# Altium PCB Module Board.PcbDoc (part 1 of 6)
Units mm, origin at the board's own origin, x right, y up, seen from the top; angles counter-clockwise.
Board outline 300 x 80 mm, 4 copper layers (Top Layer, GND1-Layer, GND2-Layer, Bottom Layer), stack 1.586 mm thick; 425 components, 248 nets, 1063 pads, 936 vias.
Unrouted connection lines stored in the file: 3.
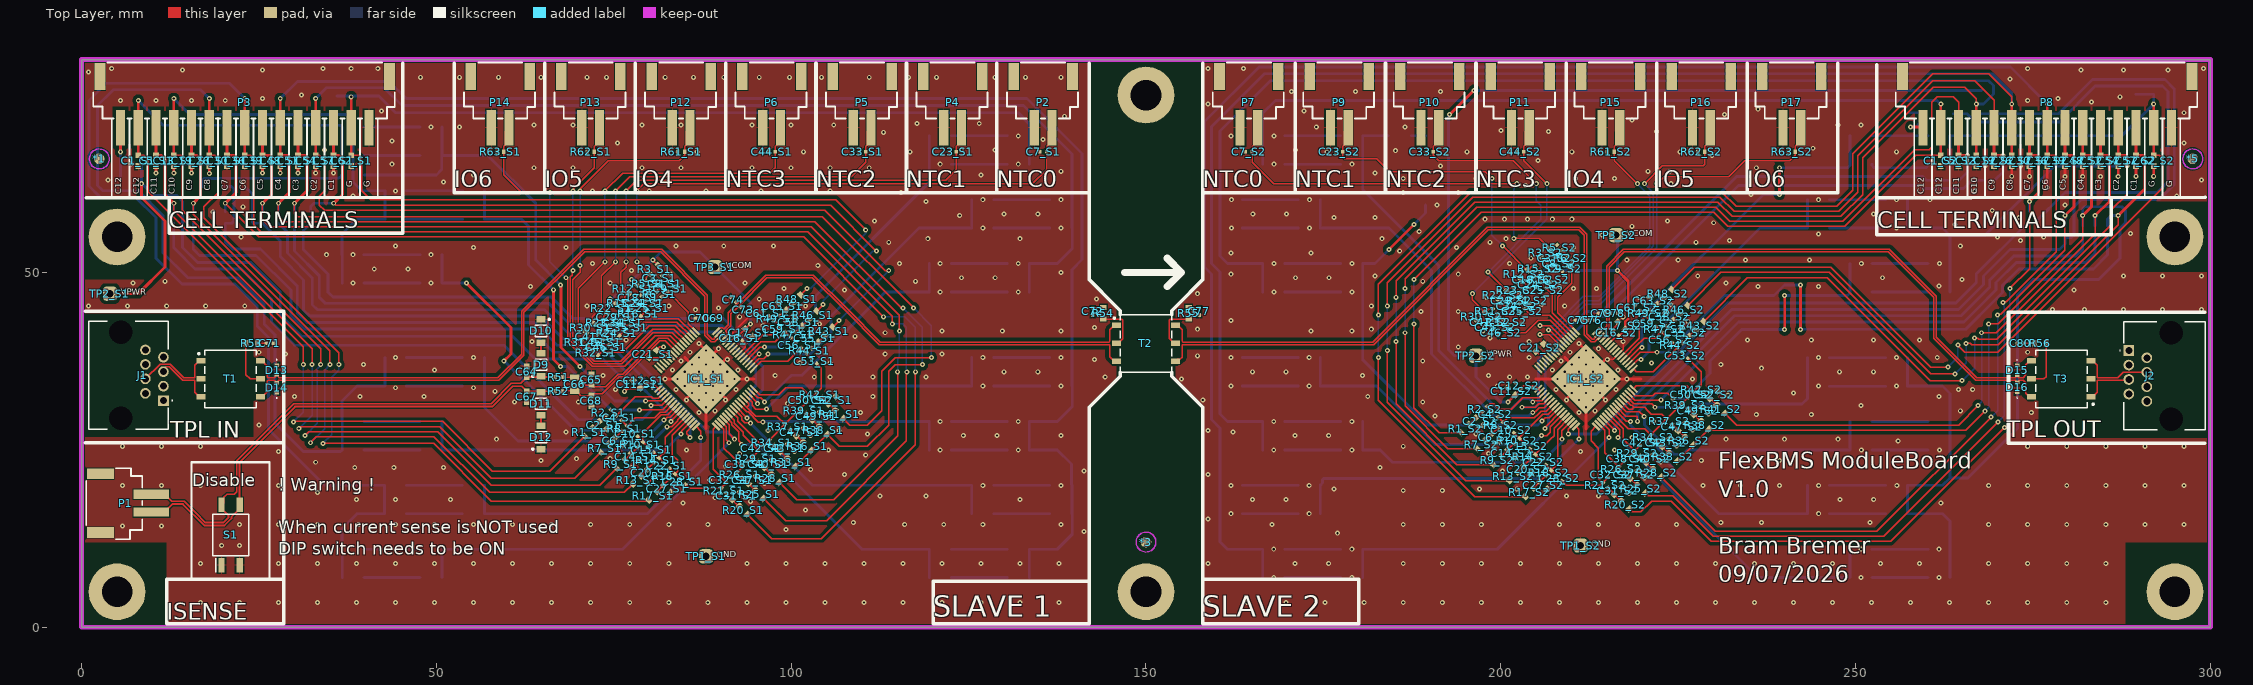
[diagram p0: Top Layer view]
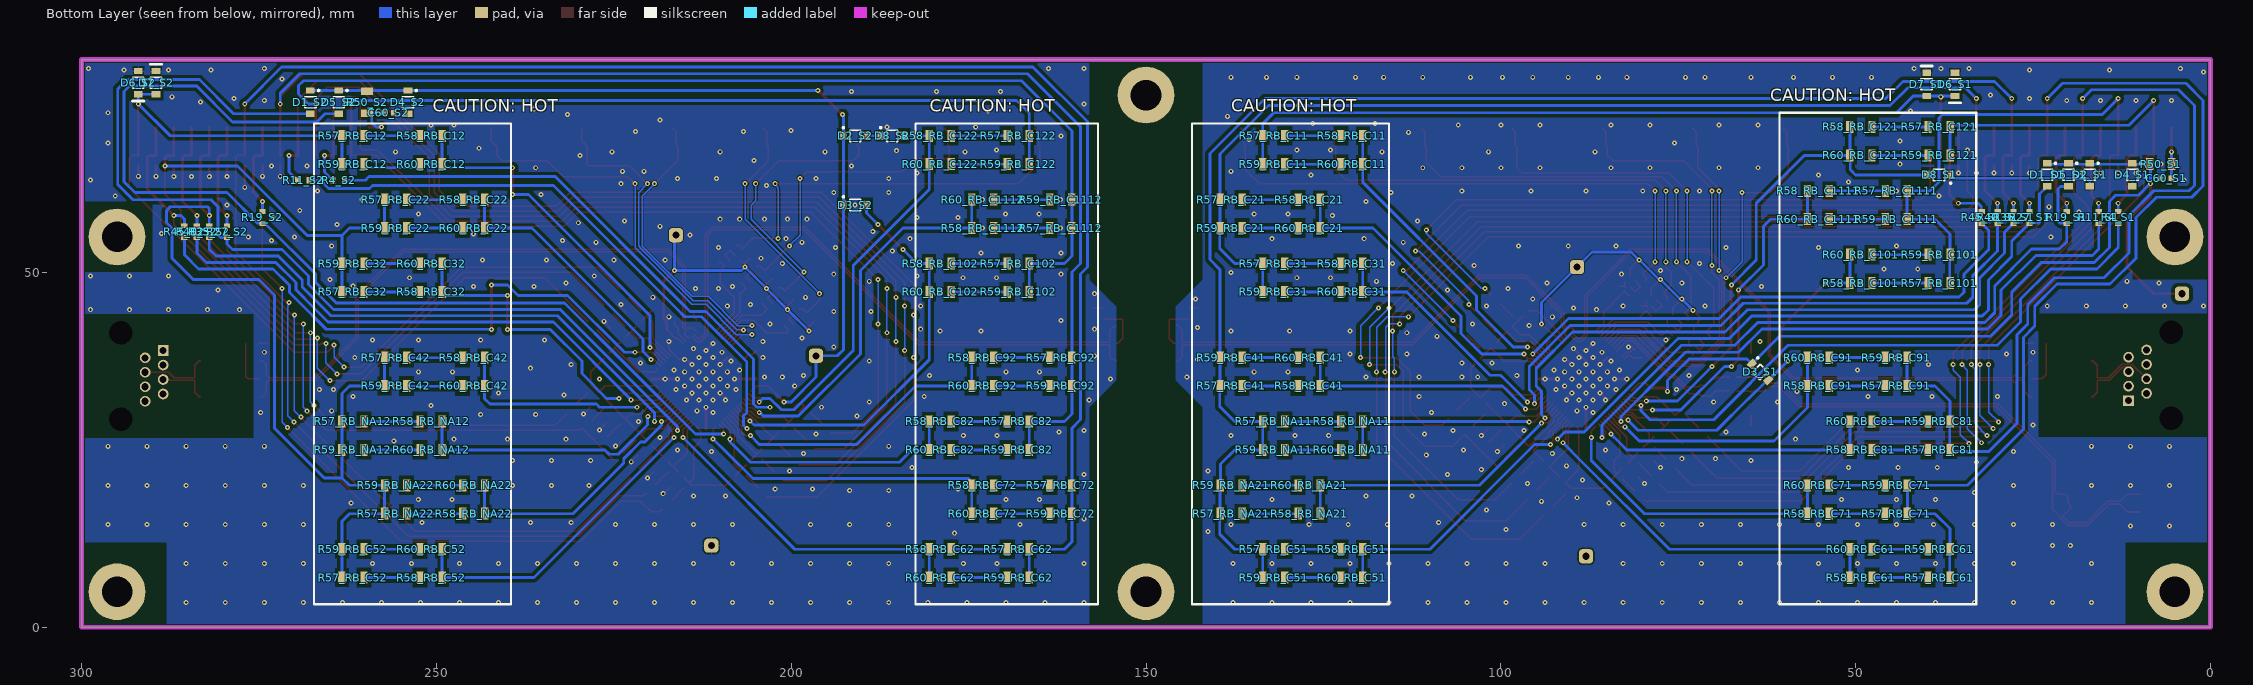
[diagram p1: Bottom Layer view, seen from below]
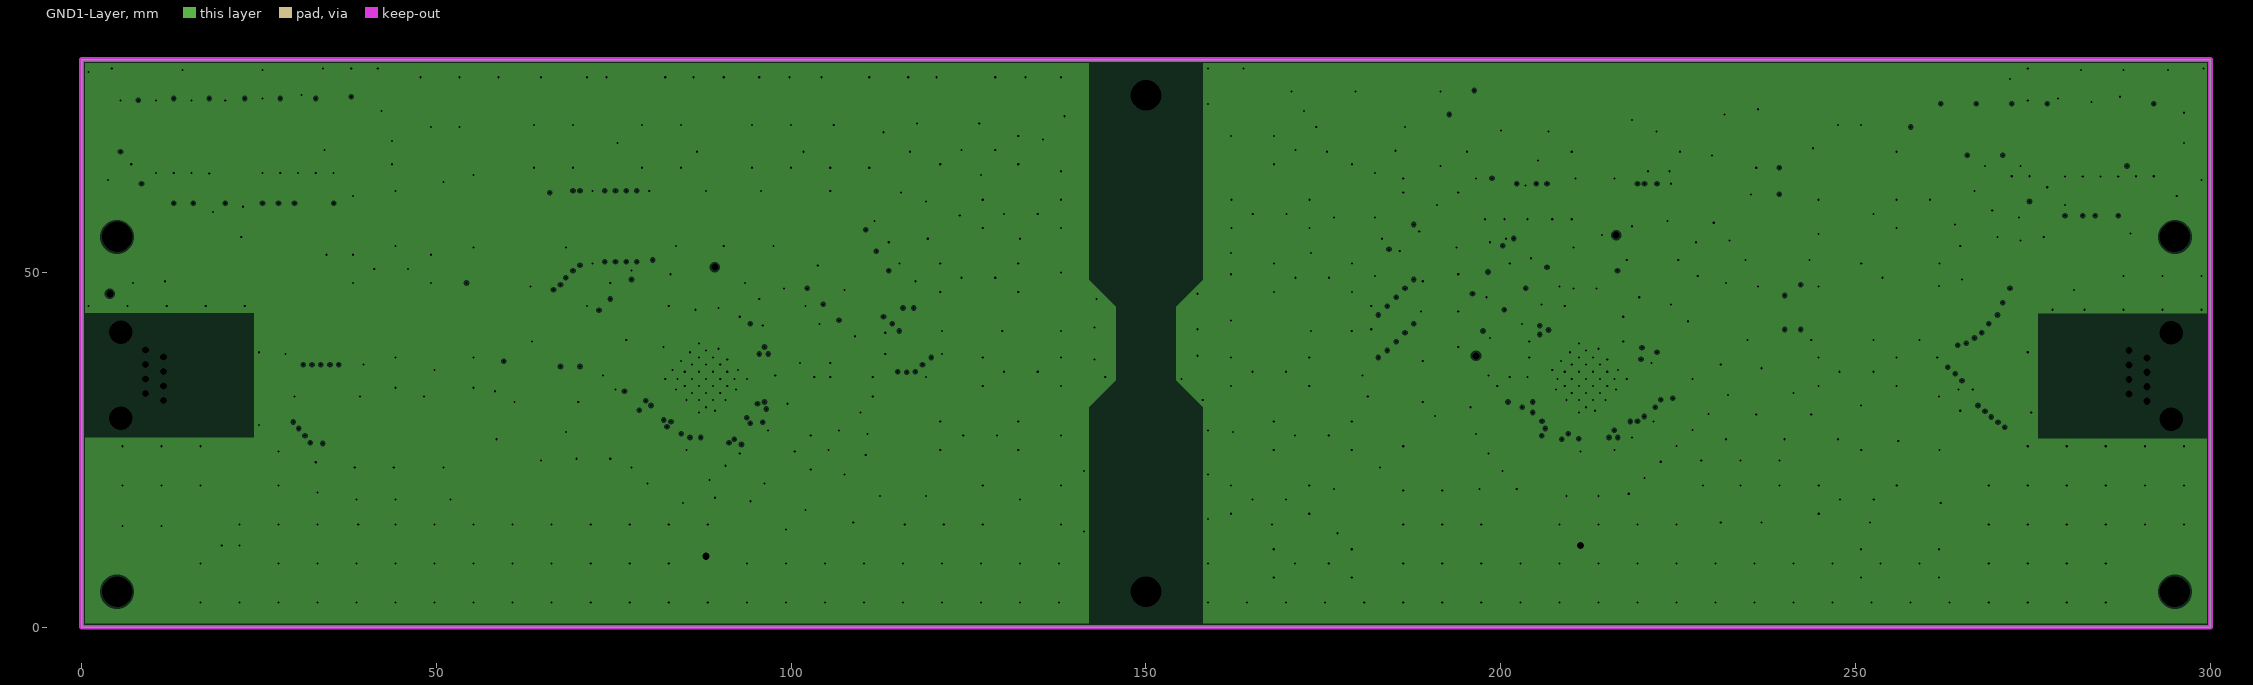
[diagram p2: GND1-Layer, clearances drawn from the general rule]
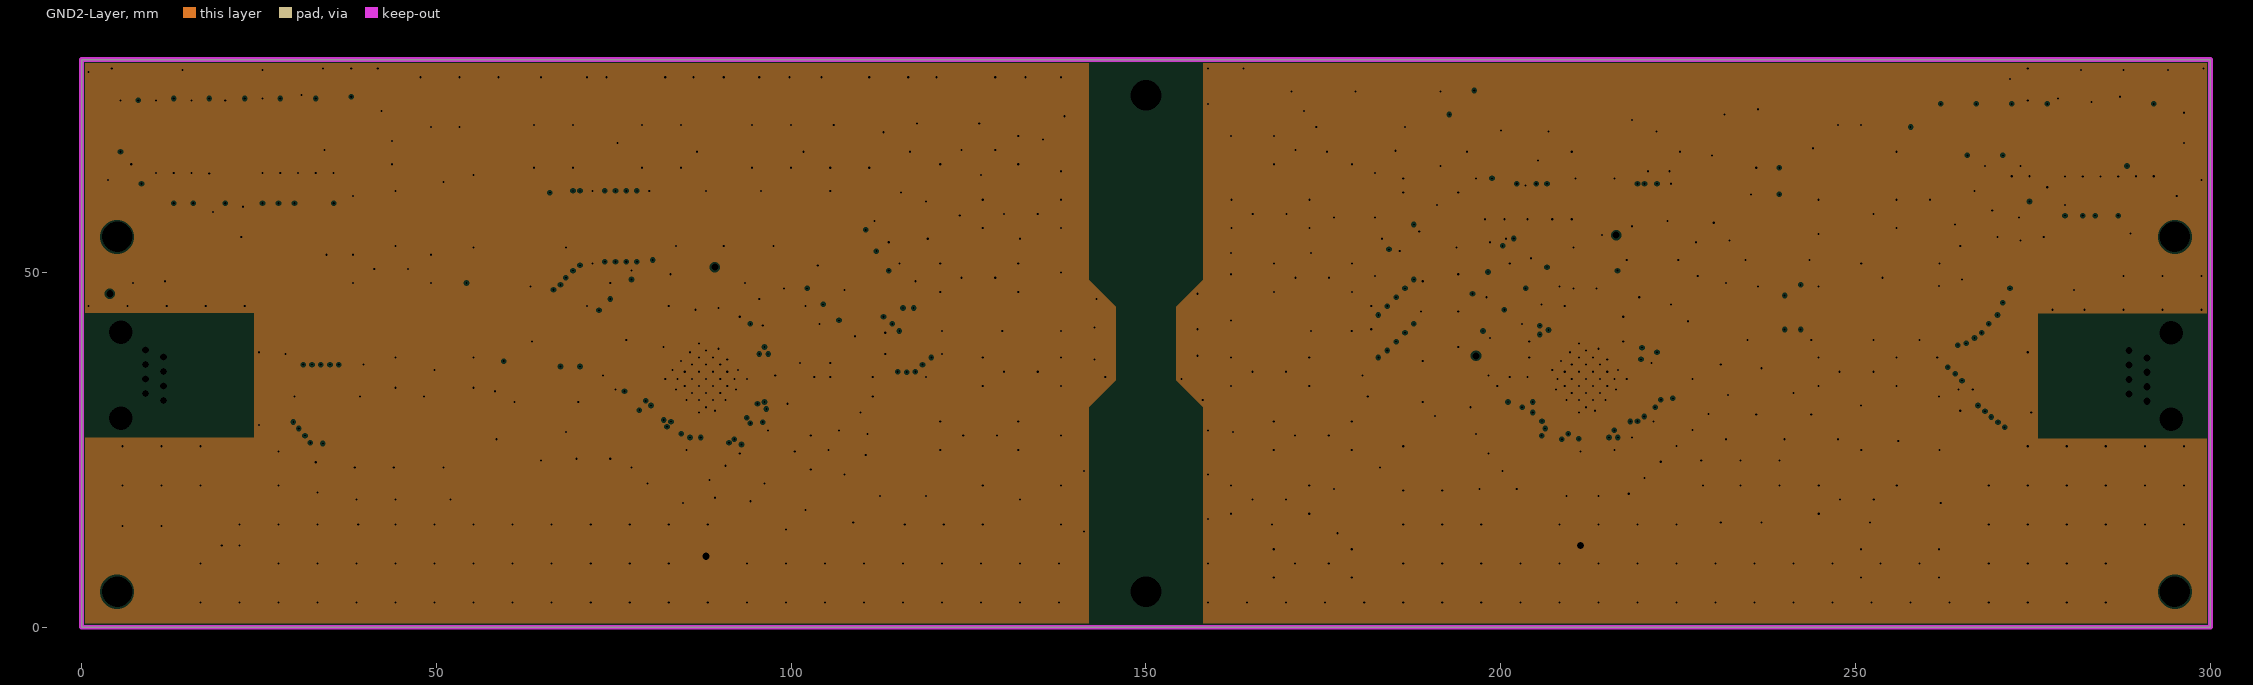
[diagram p3: GND2-Layer, clearances drawn from the general rule]
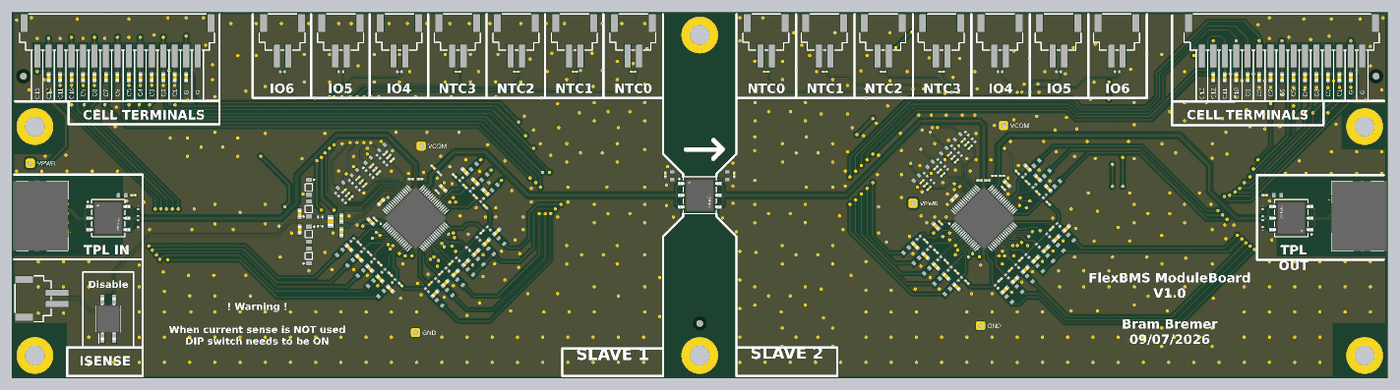
[diagram p8: 3D render of the assembled board from above, using the file's embedded part models]

## Layer stack, top to bottom
Top Solder: solder mask 0.0102, Solder Resist, Dk 3.8
Top Layer: signal copper 0.035
Dielectric1: prepreg 0.2104, FR-4, Dk 4.4
GND1-Layer: plane copper 0.0152, net (Multiple Nets)
Dielectric2: core 1.065, FR-4, Dk 4.6
GND2-Layer: plane copper 0.0152, net (Multiple Nets)
Dielectric3: prepreg 0.2104, FR-4, Dk 4.4
Bottom Layer: signal copper 0.035
Bottom Solder: solder mask 0.0102, Solder Resist, Dk 3.8

## Board outline
0,0 300,0 300,80 0,80

## Design rules (kind name [scope] priority, off if disabled: settings)
BoardOutlineClearance [All] p1: gap=0.25 ignorepadtopadclearanceinfootprint=FALSE except(0: Arc-SplitContinuation Track-SplitContinuation SMDPad-SplitContinuation THPad-SplitContinuation Via-SplitContinuation Fill-SplitContinuation Poly-SplitContinuation Region-SplitContinuation Text-SplitContinuation)
Clearance "Schematic Clearance Constraint" [InDifferentialPairClass('TPL100')] p1: gap=0.15 ignorepadtopadclearanceinfootprint=FALSE except(0.6: Arc-Fill Arc-Poly Arc-Region Track-Fill Track-Poly Track-Region Fill-Fill Fill-Poly Fill-Region Poly-Poly Poly-Region Region-Region)
Clearance Clearance_MC33771C [WithinRoom('MC33771C_S1_CLEARANCE') OR WithinRoom('MC33771C_S2_CLEARANCE') vs Not (InNet('GND_S1') OR InNet('GND_S2'))] p2: gap=0.15 ignorepadtopadclearanceinfootprint=TRUE // Exception to cope with 0.2mm spacing on the MC33771C
Clearance "Schematic Clearance Constraint_162" [InNet('CB_1_S1')] p3: gap=0.5 ignorepadtopadclearanceinfootprint=TRUE except(0.15: Arc-Text Arc-Hole Track-Text Track-Hole SMDPad-Text SMDPad-Hole THPad-Text THPad-Hole Via-Text Via-Hole Fill-Text Fill-Hole Poly-Text Poly-Hole Region-Text Region-Hole Text-Text Text-Hole)
Clearance "Schematic Clearance Constraint_161" [InNet('NetC31_S2_2')] p4: gap=0.5 ignorepadtopadclearanceinfootprint=TRUE except(0.15: Arc-Text Arc-Hole Track-Text Track-Hole SMDPad-Text SMDPad-Hole THPad-Text THPad-Hole Via-Text Via-Hole Fill-Text Fill-Hole Poly-Text Poly-Hole Region-Text Region-Hole Text-Text Text-Hole)
Clearance "Schematic Clearance Constraint_160" [InNet('NetR57_RB_C92_2')] p5: gap=0.5 ignorepadtopadclearanceinfootprint=TRUE except(0.15: Arc-Text Arc-Hole Track-Text Track-Hole SMDPad-Text SMDPad-Hole THPad-Text THPad-Hole Via-Text Via-Hole Fill-Text Fill-Hole Poly-Text Poly-Hole Region-Text Region-Hole Text-Text Text-Hole)
Clearance "Schematic Clearance Constraint_159" [InNet('NetR57_RB_C82_2')] p6: gap=0.5 ignorepadtopadclearanceinfootprint=TRUE except(0.15: Arc-Text Arc-Hole Track-Text Track-Hole SMDPad-Text SMDPad-Hole THPad-Text THPad-Hole Via-Text Via-Hole Fill-Text Fill-Hole Poly-Text Poly-Hole Region-Text Region-Hole Text-Text Text-Hole)
Clearance "Schematic Clearance Constraint_158" [InNet('NetR57_RB_C72_2')] p7: gap=0.5 ignorepadtopadclearanceinfootprint=TRUE except(0.15: Arc-Text Arc-Hole Track-Text Track-Hole SMDPad-Text SMDPad-Hole THPad-Text THPad-Hole Via-Text Via-Hole Fill-Text Fill-Hole Poly-Text Poly-Hole Region-Text Region-Hole Text-Text Text-Hole)
Clearance "Schematic Clearance Constraint_157" [InNet('NetR57_RB_C62_2')] p8: gap=0.5 ignorepadtopadclearanceinfootprint=TRUE except(0.15: Arc-Text Arc-Hole Track-Text Track-Hole SMDPad-Text SMDPad-Hole THPad-Text THPad-Hole Via-Text Via-Hole Fill-Text Fill-Hole Poly-Text Poly-Hole Region-Text Region-Hole Text-Text Text-Hole)
Clearance "Schematic Clearance Constraint_156" [InNet('NetR57_RB_C52_2')] p9: gap=0.5 ignorepadtopadclearanceinfootprint=TRUE except(0.15: Arc-Text Arc-Hole Track-Text Track-Hole SMDPad-Text SMDPad-Hole THPad-Text THPad-Hole Via-Text Via-Hole Fill-Text Fill-Hole Poly-Text Poly-Hole Region-Text Region-Hole Text-Text Text-Hole)
Clearance "Schematic Clearance Constraint_155" [InNet('NetR57_RB_C42_2')] p10: gap=0.5 ignorepadtopadclearanceinfootprint=TRUE except(0.15: Arc-Text Arc-Hole Track-Text Track-Hole SMDPad-Text SMDPad-Hole THPad-Text THPad-Hole Via-Text Via-Hole Fill-Text Fill-Hole Poly-Text Poly-Hole Region-Text Region-Hole Text-Text Text-Hole)
Clearance "Schematic Clearance Constraint_154" [InNet('NetR57_RB_C32_2')] p11: gap=0.5 ignorepadtopadclearanceinfootprint=TRUE except(0.15: Arc-Text Arc-Hole Track-Text Track-Hole SMDPad-Text SMDPad-Hole THPad-Text THPad-Hole Via-Text Via-Hole Fill-Text Fill-Hole Poly-Text Poly-Hole Region-Text Region-Hole Text-Text Text-Hole)
Clearance "Schematic Clearance Constraint_153" [InNet('NetR57_RB_C22_2')] p12: gap=0.5 ignorepadtopadclearanceinfootprint=TRUE except(0.15: Arc-Text Arc-Hole Track-Text Track-Hole SMDPad-Text SMDPad-Hole THPad-Text THPad-Hole Via-Text Via-Hole Fill-Text Fill-Hole Poly-Text Poly-Hole Region-Text Region-Hole Text-Text Text-Hole)
Clearance "Schematic Clearance Constraint_152" [InNet('NetR57_RB_C12_2')] p13: gap=0.5 ignorepadtopadclearanceinfootprint=TRUE except(0.15: Arc-Text Arc-Hole Track-Text Track-Hole SMDPad-Text SMDPad-Hole THPad-Text THPad-Hole Via-Text Via-Hole Fill-Text Fill-Hole Poly-Text Poly-Hole Region-Text Region-Hole Text-Text Text-Hole)
Clearance "Schematic Clearance Constraint_151" [InNet('NetC63_S2_2')] p14: gap=0.5 ignorepadtopadclearanceinfootprint=TRUE except(0.15: Arc-Text Arc-Hole Track-Text Track-Hole SMDPad-Text SMDPad-Hole THPad-Text THPad-Hole Via-Text Via-Hole Fill-Text Fill-Hole Poly-Text Poly-Hole Region-Text Region-Hole Text-Text Text-Hole)
Clearance "Schematic Clearance Constraint_150" [InNet('NetC58_S2_2')] p15: gap=0.5 ignorepadtopadclearanceinfootprint=TRUE except(0.15: Arc-Text Arc-Hole Track-Text Track-Hole SMDPad-Text SMDPad-Hole THPad-Text THPad-Hole Via-Text Via-Hole Fill-Text Fill-Hole Poly-Text Poly-Hole Region-Text Region-Hole Text-Text Text-Hole)
Clearance "Schematic Clearance Constraint_149" [InNet('NetC55_S2_2')] p16: gap=0.5 ignorepadtopadclearanceinfootprint=TRUE except(0.15: Arc-Text Arc-Hole Track-Text Track-Hole SMDPad-Text SMDPad-Hole THPad-Text THPad-Hole Via-Text Via-Hole Fill-Text Fill-Hole Poly-Text Poly-Hole Region-Text Region-Hole Text-Text Text-Hole)
Clearance "Schematic Clearance Constraint_148" [InNet('NetC52_S2_2')] p17: gap=0.5 ignorepadtopadclearanceinfootprint=TRUE except(0.15: Arc-Text Arc-Hole Track-Text Track-Hole SMDPad-Text SMDPad-Hole THPad-Text THPad-Hole Via-Text Via-Hole Fill-Text Fill-Hole Poly-Text Poly-Hole Region-Text Region-Hole Text-Text Text-Hole)
Clearance "Schematic Clearance Constraint_147" [InNet('NetC49_S2_2')] p18: gap=0.5 ignorepadtopadclearanceinfootprint=TRUE except(0.15: Arc-Text Arc-Hole Track-Text Track-Hole SMDPad-Text SMDPad-Hole THPad-Text THPad-Hole Via-Text Via-Hole Fill-Text Fill-Hole Poly-Text Poly-Hole Region-Text Region-Hole Text-Text Text-Hole)
Clearance "Schematic Clearance Constraint_146" [InNet('NetC47_S2_2')] p19: gap=0.5 ignorepadtopadclearanceinfootprint=TRUE except(0.15: Arc-Text Arc-Hole Track-Text Track-Hole SMDPad-Text SMDPad-Hole THPad-Text THPad-Hole Via-Text Via-Hole Fill-Text Fill-Hole Poly-Text Poly-Hole Region-Text Region-Hole Text-Text Text-Hole)
Clearance "Schematic Clearance Constraint_145" [InNet('NetC43_S2_2')] p20: gap=0.5 ignorepadtopadclearanceinfootprint=TRUE except(0.15: Arc-Text Arc-Hole Track-Text Track-Hole SMDPad-Text SMDPad-Hole THPad-Text THPad-Hole Via-Text Via-Hole Fill-Text Fill-Hole Poly-Text Poly-Hole Region-Text Region-Hole Text-Text Text-Hole)
Clearance "Schematic Clearance Constraint_144" [InNet('NetC40_S2_2')] p21: gap=0.5 ignorepadtopadclearanceinfootprint=TRUE except(0.15: Arc-Text Arc-Hole Track-Text Track-Hole SMDPad-Text SMDPad-Hole THPad-Text THPad-Hole Via-Text Via-Hole Fill-Text Fill-Hole Poly-Text Poly-Hole Region-Text Region-Hole Text-Text Text-Hole)
Clearance "Schematic Clearance Constraint_143" [InNet('NetR57_RB_C102_2')] p22: gap=0.5 ignorepadtopadclearanceinfootprint=TRUE except(0.15: Arc-Text Arc-Hole Track-Text Track-Hole SMDPad-Text SMDPad-Hole THPad-Text THPad-Hole Via-Text Via-Hole Fill-Text Fill-Hole Poly-Text Poly-Hole Region-Text Region-Hole Text-Text Text-Hole)
Clearance "Schematic Clearance Constraint_142" [InNet('NetR57_RB_C122_2')] p23: gap=0.5 ignorepadtopadclearanceinfootprint=TRUE except(0.15: Arc-Text Arc-Hole Track-Text Track-Hole SMDPad-Text SMDPad-Hole THPad-Text THPad-Hole Via-Text Via-Hole Fill-Text Fill-Hole Poly-Text Poly-Hole Region-Text Region-Hole Text-Text Text-Hole)
Clearance "Schematic Clearance Constraint_141" [InNet('NetR57_RB_C1112_2')] p24: gap=0.5 ignorepadtopadclearanceinfootprint=TRUE except(0.15: Arc-Text Arc-Hole Track-Text Track-Hole SMDPad-Text SMDPad-Hole THPad-Text THPad-Hole Via-Text Via-Hole Fill-Text Fill-Hole Poly-Text Poly-Hole Region-Text Region-Hole Text-Text Text-Hole)
Clearance "Schematic Clearance Constraint_140" [InNet('NetR59_RB_C82_2')] p25: gap=0.5 ignorepadtopadclearanceinfootprint=TRUE except(0.15: Arc-Text Arc-Hole Track-Text Track-Hole SMDPad-Text SMDPad-Hole THPad-Text THPad-Hole Via-Text Via-Hole Fill-Text Fill-Hole Poly-Text Poly-Hole Region-Text Region-Hole Text-Text Text-Hole)
Clearance "Schematic Clearance Constraint_139" [InNet('S2_VBAT')] p26: gap=0.5 ignorepadtopadclearanceinfootprint=TRUE except(0.15: Arc-Text Arc-Hole Track-Text Track-Hole SMDPad-Text SMDPad-Hole THPad-Text THPad-Hole Via-Text Via-Hole Fill-Text Fill-Hole Poly-Text Poly-Hole Region-Text Region-Hole Text-Text Text-Hole)
Clearance "Schematic Clearance Constraint_138" [InNet('NetR59_RB_NA22_2')] p27: gap=0.5 ignorepadtopadclearanceinfootprint=TRUE except(0.15: Arc-Text Arc-Hole Track-Text Track-Hole SMDPad-Text SMDPad-Hole THPad-Text THPad-Hole Via-Text Via-Hole Fill-Text Fill-Hole Poly-Text Poly-Hole Region-Text Region-Hole Text-Text Text-Hole)
Clearance "Schematic Clearance Constraint_137" [InNet('NetR59_RB_NA12_2')] p28: gap=0.5 ignorepadtopadclearanceinfootprint=TRUE except(0.15: Arc-Text Arc-Hole Track-Text Track-Hole SMDPad-Text SMDPad-Hole THPad-Text THPad-Hole Via-Text Via-Hole Fill-Text Fill-Hole Poly-Text Poly-Hole Region-Text Region-Hole Text-Text Text-Hole)
Clearance "Schematic Clearance Constraint_136" [InNet('NetR59_RB_C1112_2')] p29: gap=0.5 ignorepadtopadclearanceinfootprint=TRUE except(0.15: Arc-Text Arc-Hole Track-Text Track-Hole SMDPad-Text SMDPad-Hole THPad-Text THPad-Hole Via-Text Via-Hole Fill-Text Fill-Hole Poly-Text Poly-Hole Region-Text Region-Hole Text-Text Text-Hole)
Clearance "Schematic Clearance Constraint_135" [InNet('NetR59_RB_C122_2')] p30: gap=0.5 ignorepadtopadclearanceinfootprint=TRUE except(0.15: Arc-Text Arc-Hole Track-Text Track-Hole SMDPad-Text SMDPad-Hole THPad-Text THPad-Hole Via-Text Via-Hole Fill-Text Fill-Hole Poly-Text Poly-Hole Region-Text Region-Hole Text-Text Text-Hole)
Clearance "Schematic Clearance Constraint_134" [InNet('NetR59_RB_C102_2')] p31: gap=0.5 ignorepadtopadclearanceinfootprint=TRUE except(0.15: Arc-Text Arc-Hole Track-Text Track-Hole SMDPad-Text SMDPad-Hole THPad-Text THPad-Hole Via-Text Via-Hole Fill-Text Fill-Hole Poly-Text Poly-Hole Region-Text Region-Hole Text-Text Text-Hole)
Clearance "Schematic Clearance Constraint_133" [InNet('NetR59_RB_C92_2')] p32: gap=0.5 ignorepadtopadclearanceinfootprint=TRUE except(0.15: Arc-Text Arc-Hole Track-Text Track-Hole SMDPad-Text SMDPad-Hole THPad-Text THPad-Hole Via-Text Via-Hole Fill-Text Fill-Hole Poly-Text Poly-Hole Region-Text Region-Hole Text-Text Text-Hole)
Clearance "Schematic Clearance Constraint_132" [InNet('NetR59_RB_C72_2')] p33: gap=0.5 ignorepadtopadclearanceinfootprint=TRUE except(0.15: Arc-Text Arc-Hole Track-Text Track-Hole SMDPad-Text SMDPad-Hole THPad-Text THPad-Hole Via-Text Via-Hole Fill-Text Fill-Hole Poly-Text Poly-Hole Region-Text Region-Hole Text-Text Text-Hole)
Clearance "Schematic Clearance Constraint_131" [InNet('NetR57_RB_NA12_2')] p34: gap=0.5 ignorepadtopadclearanceinfootprint=TRUE except(0.15: Arc-Text Arc-Hole Track-Text Track-Hole SMDPad-Text SMDPad-Hole THPad-Text THPad-Hole Via-Text Via-Hole Fill-Text Fill-Hole Poly-Text Poly-Hole Region-Text Region-Hole Text-Text Text-Hole)
Clearance "Schematic Clearance Constraint_130" [InNet('NetR59_RB_C62_2')] p35: gap=0.5 ignorepadtopadclearanceinfootprint=TRUE except(0.15: Arc-Text Arc-Hole Track-Text Track-Hole SMDPad-Text SMDPad-Hole THPad-Text THPad-Hole Via-Text Via-Hole Fill-Text Fill-Hole Poly-Text Poly-Hole Region-Text Region-Hole Text-Text Text-Hole)
Clearance "Schematic Clearance Constraint_129" [InNet('NetR59_RB_C52_2')] p36: gap=0.5 ignorepadtopadclearanceinfootprint=TRUE except(0.15: Arc-Text Arc-Hole Track-Text Track-Hole SMDPad-Text SMDPad-Hole THPad-Text THPad-Hole Via-Text Via-Hole Fill-Text Fill-Hole Poly-Text Poly-Hole Region-Text Region-Hole Text-Text Text-Hole)
Clearance "Schematic Clearance Constraint_128" [InNet('NetR59_RB_C42_2')] p37: gap=0.5 ignorepadtopadclearanceinfootprint=TRUE except(0.15: Arc-Text Arc-Hole Track-Text Track-Hole SMDPad-Text SMDPad-Hole THPad-Text THPad-Hole Via-Text Via-Hole Fill-Text Fill-Hole Poly-Text Poly-Hole Region-Text Region-Hole Text-Text Text-Hole)
Clearance "Schematic Clearance Constraint_127" [InNet('NetR59_RB_C32_2')] p38: gap=0.5 ignorepadtopadclearanceinfootprint=TRUE except(0.15: Arc-Text Arc-Hole Track-Text Track-Hole SMDPad-Text SMDPad-Hole THPad-Text THPad-Hole Via-Text Via-Hole Fill-Text Fill-Hole Poly-Text Poly-Hole Region-Text Region-Hole Text-Text Text-Hole)
Clearance "Schematic Clearance Constraint_126" [InNet('NetR59_RB_C22_2')] p39: gap=0.5 ignorepadtopadclearanceinfootprint=TRUE except(0.15: Arc-Text Arc-Hole Track-Text Track-Hole SMDPad-Text SMDPad-Hole THPad-Text THPad-Hole Via-Text Via-Hole Fill-Text Fill-Hole Poly-Text Poly-Hole Region-Text Region-Hole Text-Text Text-Hole)
Clearance "Schematic Clearance Constraint_125" [InNet('NetR59_RB_C12_2')] p40: gap=0.5 ignorepadtopadclearanceinfootprint=TRUE except(0.15: Arc-Text Arc-Hole Track-Text Track-Hole SMDPad-Text SMDPad-Hole THPad-Text THPad-Hole Via-Text Via-Hole Fill-Text Fill-Hole Poly-Text Poly-Hole Region-Text Region-Hole Text-Text Text-Hole)
Clearance "Schematic Clearance Constraint_124" [InNet('NetR57_RB_NA22_2')] p41: gap=0.5 ignorepadtopadclearanceinfootprint=TRUE except(0.15: Arc-Text Arc-Hole Track-Text Track-Hole SMDPad-Text SMDPad-Hole THPad-Text THPad-Hole Via-Text Via-Hole Fill-Text Fill-Hole Poly-Text Poly-Hole Region-Text Region-Hole Text-Text Text-Hole)
Clearance "Schematic Clearance Constraint_123" [InNet('NetC37_S2_2')] p42: gap=0.5 ignorepadtopadclearanceinfootprint=TRUE except(0.15: Arc-Text Arc-Hole Track-Text Track-Hole SMDPad-Text SMDPad-Hole THPad-Text THPad-Hole Via-Text Via-Hole Fill-Text Fill-Hole Poly-Text Poly-Hole Region-Text Region-Hole Text-Text Text-Hole)
Clearance "Schematic Clearance Constraint_122" [InNet('NetC27_S2_2')] p43: gap=0.5 ignorepadtopadclearanceinfootprint=TRUE except(0.15: Arc-Text Arc-Hole Track-Text Track-Hole SMDPad-Text SMDPad-Hole THPad-Text THPad-Hole Via-Text Via-Hole Fill-Text Fill-Hole Poly-Text Poly-Hole Region-Text Region-Hole Text-Text Text-Hole)
Clearance "Schematic Clearance Constraint_121" [InNet('CB_2:1_C_S1')] p44: gap=0.5 ignorepadtopadclearanceinfootprint=TRUE except(0.15: Arc-Text Arc-Hole Track-Text Track-Hole SMDPad-Text SMDPad-Hole THPad-Text THPad-Hole Via-Text Via-Hole Fill-Text Fill-Hole Poly-Text Poly-Hole Region-Text Region-Hole Text-Text Text-Hole)
Clearance "Schematic Clearance Constraint_120" [InNet('NetC20_S2_2')] p45: gap=0.5 ignorepadtopadclearanceinfootprint=TRUE except(0.15: Arc-Text Arc-Hole Track-Text Track-Hole SMDPad-Text SMDPad-Hole THPad-Text THPad-Hole Via-Text Via-Hole Fill-Text Fill-Hole Poly-Text Poly-Hole Region-Text Region-Hole Text-Text Text-Hole)
Clearance "Schematic Clearance Constraint_119" [InNet('CB_12_S2')] p46: gap=0.5 ignorepadtopadclearanceinfootprint=TRUE except(0.15: Arc-Text Arc-Hole Track-Text Track-Hole SMDPad-Text SMDPad-Hole THPad-Text THPad-Hole Via-Text Via-Hole Fill-Text Fill-Hole Poly-Text Poly-Hole Region-Text Region-Hole Text-Text Text-Hole)
Clearance "Schematic Clearance Constraint_118" [InNet('CB_12:11_C_S2')] p47: gap=0.5 ignorepadtopadclearanceinfootprint=TRUE except(0.15: Arc-Text Arc-Hole Track-Text Track-Hole SMDPad-Text SMDPad-Hole THPad-Text THPad-Hole Via-Text Via-Hole Fill-Text Fill-Hole Poly-Text Poly-Hole Region-Text Region-Hole Text-Text Text-Hole)
Clearance "Schematic Clearance Constraint_117" [InNet('CB_11_S2')] p48: gap=0.5 ignorepadtopadclearanceinfootprint=TRUE except(0.15: Arc-Text Arc-Hole Track-Text Track-Hole SMDPad-Text SMDPad-Hole THPad-Text THPad-Hole Via-Text Via-Hole Fill-Text Fill-Hole Poly-Text Poly-Hole Region-Text Region-Hole Text-Text Text-Hole)
Clearance "Schematic Clearance Constraint_116" [InNet('CB_10_S2')] p49: gap=0.5 ignorepadtopadclearanceinfootprint=TRUE except(0.15: Arc-Text Arc-Hole Track-Text Track-Hole SMDPad-Text SMDPad-Hole THPad-Text THPad-Hole Via-Text Via-Hole Fill-Text Fill-Hole Poly-Text Poly-Hole Region-Text Region-Hole Text-Text Text-Hole)
Clearance "Schematic Clearance Constraint_115" [InNet('CB_10:9_C_S2')] p50: gap=0.5 ignorepadtopadclearanceinfootprint=TRUE except(0.15: Arc-Text Arc-Hole Track-Text Track-Hole SMDPad-Text SMDPad-Hole THPad-Text THPad-Hole Via-Text Via-Hole Fill-Text Fill-Hole Poly-Text Poly-Hole Region-Text Region-Hole Text-Text Text-Hole)
Clearance "Schematic Clearance Constraint_114" [InNet('CB_9_S2')] p51: gap=0.5 ignorepadtopadclearanceinfootprint=TRUE except(0.15: Arc-Text Arc-Hole Track-Text Track-Hole SMDPad-Text SMDPad-Hole THPad-Text THPad-Hole Via-Text Via-Hole Fill-Text Fill-Hole Poly-Text Poly-Hole Region-Text Region-Hole Text-Text Text-Hole)
Clearance "Schematic Clearance Constraint_113" [InNet('CB_8_S2')] p52: gap=0.5 ignorepadtopadclearanceinfootprint=TRUE except(0.15: Arc-Text Arc-Hole Track-Text Track-Hole SMDPad-Text SMDPad-Hole THPad-Text THPad-Hole Via-Text Via-Hole Fill-Text Fill-Hole Poly-Text Poly-Hole Region-Text Region-Hole Text-Text Text-Hole)
Clearance "Schematic Clearance Constraint_112" [InNet('CB_8:7_C_S2')] p53: gap=0.5 ignorepadtopadclearanceinfootprint=TRUE except(0.15: Arc-Text Arc-Hole Track-Text Track-Hole SMDPad-Text SMDPad-Hole THPad-Text THPad-Hole Via-Text Via-Hole Fill-Text Fill-Hole Poly-Text Poly-Hole Region-Text Region-Hole Text-Text Text-Hole)
Clearance "Schematic Clearance Constraint_111" [InNet('CB_7_S2')] p54: gap=0.5 ignorepadtopadclearanceinfootprint=TRUE except(0.15: Arc-Text Arc-Hole Track-Text Track-Hole SMDPad-Text SMDPad-Hole THPad-Text THPad-Hole Via-Text Via-Hole Fill-Text Fill-Hole Poly-Text Poly-Hole Region-Text Region-Hole Text-Text Text-Hole)
Clearance "Schematic Clearance Constraint_110" [InNet('CB_6_S2')] p55: gap=0.5 ignorepadtopadclearanceinfootprint=TRUE except(0.15: Arc-Text Arc-Hole Track-Text Track-Hole SMDPad-Text SMDPad-Hole THPad-Text THPad-Hole Via-Text Via-Hole Fill-Text Fill-Hole Poly-Text Poly-Hole Region-Text Region-Hole Text-Text Text-Hole)
Clearance "Schematic Clearance Constraint_109" [InNet('CB_6:5_C_S2')] p56: gap=0.5 ignorepadtopadclearanceinfootprint=TRUE except(0.15: Arc-Text Arc-Hole Track-Text Track-Hole SMDPad-Text SMDPad-Hole THPad-Text THPad-Hole Via-Text Via-Hole Fill-Text Fill-Hole Poly-Text Poly-Hole Region-Text Region-Hole Text-Text Text-Hole)
Clearance "Schematic Clearance Constraint_108" [InNet('CB_5_S2')] p57: gap=0.5 ignorepadtopadclearanceinfootprint=TRUE except(0.15: Arc-Text Arc-Hole Track-Text Track-Hole SMDPad-Text SMDPad-Hole THPad-Text THPad-Hole Via-Text Via-Hole Fill-Text Fill-Hole Poly-Text Poly-Hole Region-Text Region-Hole Text-Text Text-Hole)
Clearance "Schematic Clearance Constraint_107" [InNet('CB_4_S2')] p58: gap=0.5 ignorepadtopadclearanceinfootprint=TRUE except(0.15: Arc-Text Arc-Hole Track-Text Track-Hole SMDPad-Text SMDPad-Hole THPad-Text THPad-Hole Via-Text Via-Hole Fill-Text Fill-Hole Poly-Text Poly-Hole Region-Text Region-Hole Text-Text Text-Hole)
Clearance "Schematic Clearance Constraint_106" [InNet('CB_4:3_C_S2')] p59: gap=0.5 ignorepadtopadclearanceinfootprint=TRUE except(0.15: Arc-Text Arc-Hole Track-Text Track-Hole SMDPad-Text SMDPad-Hole THPad-Text THPad-Hole Via-Text Via-Hole Fill-Text Fill-Hole Poly-Text Poly-Hole Region-Text Region-Hole Text-Text Text-Hole)
Clearance "Schematic Clearance Constraint_105" [InNet('CB_3_S2')] p60: gap=0.5 ignorepadtopadclearanceinfootprint=TRUE except(0.15: Arc-Text Arc-Hole Track-Text Track-Hole SMDPad-Text SMDPad-Hole THPad-Text THPad-Hole Via-Text Via-Hole Fill-Text Fill-Hole Poly-Text Poly-Hole Region-Text Region-Hole Text-Text Text-Hole)
Clearance "Schematic Clearance Constraint_104" [InNet('CB_2_S2')] p61: gap=0.5 ignorepadtopadclearanceinfootprint=TRUE except(0.15: Arc-Text Arc-Hole Track-Text Track-Hole SMDPad-Text SMDPad-Hole THPad-Text THPad-Hole Via-Text Via-Hole Fill-Text Fill-Hole Poly-Text Poly-Hole Region-Text Region-Hole Text-Text Text-Hole)
Clearance "Schematic Clearance Constraint_103" [InNet('CB_2:1_C_S2')] p62: gap=0.5 ignorepadtopadclearanceinfootprint=TRUE except(0.15: Arc-Text Arc-Hole Track-Text Track-Hole SMDPad-Text SMDPad-Hole THPad-Text THPad-Hole Via-Text Via-Hole Fill-Text Fill-Hole Poly-Text Poly-Hole Region-Text Region-Hole Text-Text Text-Hole)
Clearance "Schematic Clearance Constraint_102" [InNet('CB_13_S2')] p63: gap=0.5 ignorepadtopadclearanceinfootprint=TRUE except(0.15: Arc-Text Arc-Hole Track-Text Track-Hole SMDPad-Text SMDPad-Hole THPad-Text THPad-Hole Via-Text Via-Hole Fill-Text Fill-Hole Poly-Text Poly-Hole Region-Text Region-Hole Text-Text Text-Hole)
Clearance "Schematic Clearance Constraint_101" [InNet('CB_14:13_C_S2')] p64: gap=0.5 ignorepadtopadclearanceinfootprint=TRUE except(0.15: Arc-Text Arc-Hole Track-Text Track-Hole SMDPad-Text SMDPad-Hole THPad-Text THPad-Hole Via-Text Via-Hole Fill-Text Fill-Hole Poly-Text Poly-Hole Region-Text Region-Hole Text-Text Text-Hole)
Clearance "Schematic Clearance Constraint_100" [InNet('CB_14_S2')] p65: gap=0.5 ignorepadtopadclearanceinfootprint=TRUE except(0.15: Arc-Text Arc-Hole Track-Text Track-Hole SMDPad-Text SMDPad-Hole THPad-Text THPad-Hole Via-Text Via-Hole Fill-Text Fill-Hole Poly-Text Poly-Hole Region-Text Region-Hole Text-Text Text-Hole)
Clearance "Schematic Clearance Constraint_99" [InNet('CT_11_S2')] p66: gap=0.5 ignorepadtopadclearanceinfootprint=TRUE except(0.15: Arc-Text Arc-Hole Track-Text Track-Hole SMDPad-Text SMDPad-Hole THPad-Text THPad-Hole Via-Text Via-Hole Fill-Text Fill-Hole Poly-Text Poly-Hole Region-Text Region-Hole Text-Text Text-Hole)
Clearance "Schematic Clearance Constraint_98" [InNet('NetC14_S2_2')] p67: gap=0.5 ignorepadtopadclearanceinfootprint=TRUE except(0.15: Arc-Text Arc-Hole Track-Text Track-Hole SMDPad-Text SMDPad-Hole THPad-Text THPad-Hole Via-Text Via-Hole Fill-Text Fill-Hole Poly-Text Poly-Hole Region-Text Region-Hole Text-Text Text-Hole)
Clearance "Schematic Clearance Constraint_97" [InNet('NetC6_S2_2')] p68: gap=0.5 ignorepadtopadclearanceinfootprint=TRUE except(0.15: Arc-Text Arc-Hole Track-Text Track-Hole SMDPad-Text SMDPad-Hole THPad-Text THPad-Hole Via-Text Via-Hole Fill-Text Fill-Hole Poly-Text Poly-Hole Region-Text Region-Hole Text-Text Text-Hole)
Clearance "Schematic Clearance Constraint_96" [InNet('NetC2_S2_2')] p69: gap=0.5 ignorepadtopadclearanceinfootprint=TRUE except(0.15: Arc-Text Arc-Hole Track-Text Track-Hole SMDPad-Text SMDPad-Hole THPad-Text THPad-Hole Via-Text Via-Hole Fill-Text Fill-Hole Poly-Text Poly-Hole Region-Text Region-Hole Text-Text Text-Hole)
Clearance "Schematic Clearance Constraint_95" [InNet('CT_REF_S2')] p70: gap=0.5 ignorepadtopadclearanceinfootprint=TRUE except(0.15: Arc-Text Arc-Hole Track-Text Track-Hole SMDPad-Text SMDPad-Hole THPad-Text THPad-Hole Via-Text Via-Hole Fill-Text Fill-Hole Poly-Text Poly-Hole Region-Text Region-Hole Text-Text Text-Hole)
Clearance "Schematic Clearance Constraint_94" [InNet('CT_14_S2')] p71: gap=0.5 ignorepadtopadclearanceinfootprint=TRUE except(0.15: Arc-Text Arc-Hole Track-Text Track-Hole SMDPad-Text SMDPad-Hole THPad-Text THPad-Hole Via-Text Via-Hole Fill-Text Fill-Hole Poly-Text Poly-Hole Region-Text Region-Hole Text-Text Text-Hole)
Clearance "Schematic Clearance Constraint_93" [InNet('CT_13_S2')] p72: gap=0.5 ignorepadtopadclearanceinfootprint=TRUE except(0.15: Arc-Text Arc-Hole Track-Text Track-Hole SMDPad-Text SMDPad-Hole THPad-Text THPad-Hole Via-Text Via-Hole Fill-Text Fill-Hole Poly-Text Poly-Hole Region-Text Region-Hole Text-Text Text-Hole)
Clearance "Schematic Clearance Constraint_92" [InNet('CT_12_S2')] p73: gap=0.5 ignorepadtopadclearanceinfootprint=TRUE except(0.15: Arc-Text Arc-Hole Track-Text Track-Hole SMDPad-Text SMDPad-Hole THPad-Text THPad-Hole Via-Text Via-Hole Fill-Text Fill-Hole Poly-Text Poly-Hole Region-Text Region-Hole Text-Text Text-Hole)
Clearance "Schematic Clearance Constraint_91" [InNet('CT_10_S2')] p74: gap=0.5 ignorepadtopadclearanceinfootprint=TRUE except(0.15: Arc-Text Arc-Hole Track-Text Track-Hole SMDPad-Text SMDPad-Hole THPad-Text THPad-Hole Via-Text Via-Hole Fill-Text Fill-Hole Poly-Text Poly-Hole Region-Text Region-Hole Text-Text Text-Hole)
Clearance "Schematic Clearance Constraint_90" [InNet('CELL_REF_S2')] p75: gap=0.5 ignorepadtopadclearanceinfootprint=TRUE except(0.15: Arc-Text Arc-Hole Track-Text Track-Hole SMDPad-Text SMDPad-Hole THPad-Text THPad-Hole Via-Text Via-Hole Fill-Text Fill-Hole Poly-Text Poly-Hole Region-Text Region-Hole Text-Text Text-Hole)
Clearance "Schematic Clearance Constraint_89" [InNet('CT_9_S2')] p76: gap=0.5 ignorepadtopadclearanceinfootprint=TRUE except(0.15: Arc-Text Arc-Hole Track-Text Track-Hole SMDPad-Text SMDPad-Hole THPad-Text THPad-Hole Via-Text Via-Hole Fill-Text Fill-Hole Poly-Text Poly-Hole Region-Text Region-Hole Text-Text Text-Hole)
Clearance "Schematic Clearance Constraint_88" [InNet('CT_8_S2')] p77: gap=0.5 ignorepadtopadclearanceinfootprint=TRUE except(0.15: Arc-Text Arc-Hole Track-Text Track-Hole SMDPad-Text SMDPad-Hole THPad-Text THPad-Hole Via-Text Via-Hole Fill-Text Fill-Hole Poly-Text Poly-Hole Region-Text Region-Hole Text-Text Text-Hole)
Clearance "Schematic Clearance Constraint_87" [InNet('CT_7_S2')] p78: gap=0.5 ignorepadtopadclearanceinfootprint=TRUE except(0.15: Arc-Text Arc-Hole Track-Text Track-Hole SMDPad-Text SMDPad-Hole THPad-Text THPad-Hole Via-Text Via-Hole Fill-Text Fill-Hole Poly-Text Poly-Hole Region-Text Region-Hole Text-Text Text-Hole)
Clearance "Schematic Clearance Constraint_86" [InNet('CT_4_S2')] p79: gap=0.5 ignorepadtopadclearanceinfootprint=TRUE except(0.15: Arc-Text Arc-Hole Track-Text Track-Hole SMDPad-Text SMDPad-Hole THPad-Text THPad-Hole Via-Text Via-Hole Fill-Text Fill-Hole Poly-Text Poly-Hole Region-Text Region-Hole Text-Text Text-Hole)
Clearance "Schematic Clearance Constraint_85" [InNet('CT_3_S2')] p80: gap=0.5 ignorepadtopadclearanceinfootprint=TRUE except(0.15: Arc-Text Arc-Hole Track-Text Track-Hole SMDPad-Text SMDPad-Hole THPad-Text THPad-Hole Via-Text Via-Hole Fill-Text Fill-Hole Poly-Text Poly-Hole Region-Text Region-Hole Text-Text Text-Hole)
Clearance "Schematic Clearance Constraint_84" [InNet('CT_2_S2')] p81: gap=0.5 ignorepadtopadclearanceinfootprint=TRUE except(0.15: Arc-Text Arc-Hole Track-Text Track-Hole SMDPad-Text SMDPad-Hole THPad-Text THPad-Hole Via-Text Via-Hole Fill-Text Fill-Hole Poly-Text Poly-Hole Region-Text Region-Hole Text-Text Text-Hole)
Clearance "Schematic Clearance Constraint_83" [InNet('CT_1_S2')] p82: gap=0.5 ignorepadtopadclearanceinfootprint=TRUE except(0.15: Arc-Text Arc-Hole Track-Text Track-Hole SMDPad-Text SMDPad-Hole THPad-Text THPad-Hole Via-Text Via-Hole Fill-Text Fill-Hole Poly-Text Poly-Hole Region-Text Region-Hole Text-Text Text-Hole)
Clearance "Schematic Clearance Constraint_82" [InNet('VPWR_S2')] p83: gap=0.5 ignorepadtopadclearanceinfootprint=TRUE except(0.15: Arc-Text Arc-Hole Track-Text Track-Hole SMDPad-Text SMDPad-Hole THPad-Text THPad-Hole Via-Text Via-Hole Fill-Text Fill-Hole Poly-Text Poly-Hole Region-Text Region-Hole Text-Text Text-Hole)
Clearance "Schematic Clearance Constraint_81" [InNetClass('S2_CELL[1..12]')] p84: gap=0.5 ignorepadtopadclearanceinfootprint=TRUE except(0.15: Arc-Text Arc-Hole Track-Text Track-Hole SMDPad-Text SMDPad-Hole THPad-Text THPad-Hole Via-Text Via-Hole Fill-Text Fill-Hole Poly-Text Poly-Hole Region-Text Region-Hole Text-Text Text-Hole)
Clearance "Schematic Clearance Constraint_80" [InNetClass('S1_CELL[1..12]')] p85: gap=0.5 ignorepadtopadclearanceinfootprint=TRUE except(0.15: Arc-Text Arc-Hole Track-Text Track-Hole SMDPad-Text SMDPad-Hole THPad-Text THPad-Hole Via-Text Via-Hole Fill-Text Fill-Hole Poly-Text Poly-Hole Region-Text Region-Hole Text-Text Text-Hole)
Clearance "Schematic Clearance Constraint_79" [InNet('VPWR_S1')] p86: gap=0.5 ignorepadtopadclearanceinfootprint=TRUE except(0.15: Arc-Text Arc-Hole Track-Text Track-Hole SMDPad-Text SMDPad-Hole THPad-Text THPad-Hole Via-Text Via-Hole Fill-Text Fill-Hole Poly-Text Poly-Hole Region-Text Region-Hole Text-Text Text-Hole)
Clearance "Schematic Clearance Constraint_78" [InNet('CT_1_S1')] p87: gap=0.5 ignorepadtopadclearanceinfootprint=TRUE except(0.15: Arc-Text Arc-Hole Track-Text Track-Hole SMDPad-Text SMDPad-Hole THPad-Text THPad-Hole Via-Text Via-Hole Fill-Text Fill-Hole Poly-Text Poly-Hole Region-Text Region-Hole Text-Text Text-Hole)
Clearance "Schematic Clearance Constraint_77" [InNet('CT_2_S1')] p88: gap=0.5 ignorepadtopadclearanceinfootprint=TRUE except(0.15: Arc-Text Arc-Hole Track-Text Track-Hole SMDPad-Text SMDPad-Hole THPad-Text THPad-Hole Via-Text Via-Hole Fill-Text Fill-Hole Poly-Text Poly-Hole Region-Text Region-Hole Text-Text Text-Hole)
Clearance "Schematic Clearance Constraint_76" [InNet('CT_3_S1')] p89: gap=0.5 ignorepadtopadclearanceinfootprint=TRUE except(0.15: Arc-Text Arc-Hole Track-Text Track-Hole SMDPad-Text SMDPad-Hole THPad-Text THPad-Hole Via-Text Via-Hole Fill-Text Fill-Hole Poly-Text Poly-Hole Region-Text Region-Hole Text-Text Text-Hole)
Clearance "Schematic Clearance Constraint_75" [InNet('CT_4_S1')] p90: gap=0.5 ignorepadtopadclearanceinfootprint=TRUE except(0.15: Arc-Text Arc-Hole Track-Text Track-Hole SMDPad-Text SMDPad-Hole THPad-Text THPad-Hole Via-Text Via-Hole Fill-Text Fill-Hole Poly-Text Poly-Hole Region-Text Region-Hole Text-Text Text-Hole)
Clearance "Schematic Clearance Constraint_74" [InNet('CT_7_S1')] p91: gap=0.5 ignorepadtopadclearanceinfootprint=TRUE except(0.15: Arc-Text Arc-Hole Track-Text Track-Hole SMDPad-Text SMDPad-Hole THPad-Text THPad-Hole Via-Text Via-Hole Fill-Text Fill-Hole Poly-Text Poly-Hole Region-Text Region-Hole Text-Text Text-Hole)
Clearance "Schematic Clearance Constraint_73" [InNet('CT_8_S1')] p92: gap=0.5 ignorepadtopadclearanceinfootprint=TRUE except(0.15: Arc-Text Arc-Hole Track-Text Track-Hole SMDPad-Text SMDPad-Hole THPad-Text THPad-Hole Via-Text Via-Hole Fill-Text Fill-Hole Poly-Text Poly-Hole Region-Text Region-Hole Text-Text Text-Hole)
Clearance "Schematic Clearance Constraint_72" [InNet('CT_9_S1')] p93: gap=0.5 ignorepadtopadclearanceinfootprint=TRUE except(0.15: Arc-Text Arc-Hole Track-Text Track-Hole SMDPad-Text SMDPad-Hole THPad-Text THPad-Hole Via-Text Via-Hole Fill-Text Fill-Hole Poly-Text Poly-Hole Region-Text Region-Hole Text-Text Text-Hole)
Clearance "Schematic Clearance Constraint_71" [InNet('CT_10_S1')] p94: gap=0.5 ignorepadtopadclearanceinfootprint=TRUE except(0.15: Arc-Text Arc-Hole Track-Text Track-Hole SMDPad-Text SMDPad-Hole THPad-Text THPad-Hole Via-Text Via-Hole Fill-Text Fill-Hole Poly-Text Poly-Hole Region-Text Region-Hole Text-Text Text-Hole)
Clearance "Schematic Clearance Constraint_70" [InNet('CT_11_S1')] p95: gap=0.5 ignorepadtopadclearanceinfootprint=TRUE except(0.15: Arc-Text Arc-Hole Track-Text Track-Hole SMDPad-Text SMDPad-Hole THPad-Text THPad-Hole Via-Text Via-Hole Fill-Text Fill-Hole Poly-Text Poly-Hole Region-Text Region-Hole Text-Text Text-Hole)
Clearance "Schematic Clearance Constraint_69" [InNet('CT_12_S1')] p96: gap=0.5 ignorepadtopadclearanceinfootprint=TRUE except(0.15: Arc-Text Arc-Hole Track-Text Track-Hole SMDPad-Text SMDPad-Hole THPad-Text THPad-Hole Via-Text Via-Hole Fill-Text Fill-Hole Poly-Text Poly-Hole Region-Text Region-Hole Text-Text Text-Hole)
Clearance "Schematic Clearance Constraint_68" [InNet('CT_13_S1')] p97: gap=0.5 ignorepadtopadclearanceinfootprint=TRUE except(0.15: Arc-Text Arc-Hole Track-Text Track-Hole SMDPad-Text SMDPad-Hole THPad-Text THPad-Hole Via-Text Via-Hole Fill-Text Fill-Hole Poly-Text Poly-Hole Region-Text Region-Hole Text-Text Text-Hole)
Clearance "Schematic Clearance Constraint_67" [InNet('CT_14_S1')] p98: gap=0.5 ignorepadtopadclearanceinfootprint=TRUE except(0.15: Arc-Text Arc-Hole Track-Text Track-Hole SMDPad-Text SMDPad-Hole THPad-Text THPad-Hole Via-Text Via-Hole Fill-Text Fill-Hole Poly-Text Poly-Hole Region-Text Region-Hole Text-Text Text-Hole)
Clearance "Schematic Clearance Constraint_66" [InNet('CT_REF_S1')] p99: gap=0.5 ignorepadtopadclearanceinfootprint=TRUE except(0.15: Arc-Text Arc-Hole Track-Text Track-Hole SMDPad-Text SMDPad-Hole THPad-Text THPad-Hole Via-Text Via-Hole Fill-Text Fill-Hole Poly-Text Poly-Hole Region-Text Region-Hole Text-Text Text-Hole)
Clearance "Schematic Clearance Constraint_65" [InNet('NetC2_S1_2')] p100: gap=0.5 ignorepadtopadclearanceinfootprint=TRUE except(0.15: Arc-Text Arc-Hole Track-Text Track-Hole SMDPad-Text SMDPad-Hole THPad-Text THPad-Hole Via-Text Via-Hole Fill-Text Fill-Hole Poly-Text Poly-Hole Region-Text Region-Hole Text-Text Text-Hole)
Clearance "Schematic Clearance Constraint_64" [InNet('NetC6_S1_2')] p101: gap=0.5 ignorepadtopadclearanceinfootprint=TRUE except(0.15: Arc-Text Arc-Hole Track-Text Track-Hole SMDPad-Text SMDPad-Hole THPad-Text THPad-Hole Via-Text Via-Hole Fill-Text Fill-Hole Poly-Text Poly-Hole Region-Text Region-Hole Text-Text Text-Hole)
Clearance "Schematic Clearance Constraint_63" [InNet('NetC14_S1_2')] p102: gap=0.5 ignorepadtopadclearanceinfootprint=TRUE except(0.15: Arc-Text Arc-Hole Track-Text Track-Hole SMDPad-Text SMDPad-Hole THPad-Text THPad-Hole Via-Text Via-Hole Fill-Text Fill-Hole Poly-Text Poly-Hole Region-Text Region-Hole Text-Text Text-Hole)
Clearance "Schematic Clearance Constraint_62" [InNet('NetC20_S1_2')] p103: gap=0.5 ignorepadtopadclearanceinfootprint=TRUE except(0.15: Arc-Text Arc-Hole Track-Text Track-Hole SMDPad-Text SMDPad-Hole THPad-Text THPad-Hole Via-Text Via-Hole Fill-Text Fill-Hole Poly-Text Poly-Hole Region-Text Region-Hole Text-Text Text-Hole)
Clearance "Schematic Clearance Constraint_61" [InNet('CELL_REF_S1')] p104: gap=0.5 ignorepadtopadclearanceinfootprint=TRUE except(0.15: Arc-Text Arc-Hole Track-Text Track-Hole SMDPad-Text SMDPad-Hole THPad-Text THPad-Hole Via-Text Via-Hole Fill-Text Fill-Hole Poly-Text Poly-Hole Region-Text Region-Hole Text-Text Text-Hole)
Clearance "Schematic Clearance Constraint_60" [InNet('CB_14_S1')] p105: gap=0.5 ignorepadtopadclearanceinfootprint=TRUE except(0.15: Arc-Text Arc-Hole Track-Text Track-Hole SMDPad-Text SMDPad-Hole THPad-Text THPad-Hole Via-Text Via-Hole Fill-Text Fill-Hole Poly-Text Poly-Hole Region-Text Region-Hole Text-Text Text-Hole)
Clearance "Schematic Clearance Constraint_59" [InNet('CB_14:13_C_S1')] p106: gap=0.5 ignorepadtopadclearanceinfootprint=TRUE except(0.15: Arc-Text Arc-Hole Track-Text Track-Hole SMDPad-Text SMDPad-Hole THPad-Text THPad-Hole Via-Text Via-Hole Fill-Text Fill-Hole Poly-Text Poly-Hole Region-Text Region-Hole Text-Text Text-Hole)
Clearance "Schematic Clearance Constraint_58" [InNet('CB_7_S1')] p107: gap=0.5 ignorepadtopadclearanceinfootprint=TRUE except(0.15: Arc-Text Arc-Hole Track-Text Track-Hole SMDPad-Text SMDPad-Hole THPad-Text THPad-Hole Via-Text Via-Hole Fill-Text Fill-Hole Poly-Text Poly-Hole Region-Text Region-Hole Text-Text Text-Hole)
Clearance "Schematic Clearance Constraint_57" [InNet('CB_2_S1')] p108: gap=0.5 ignorepadtopadclearanceinfootprint=TRUE except(0.15: Arc-Text Arc-Hole Track-Text Track-Hole SMDPad-Text SMDPad-Hole THPad-Text THPad-Hole Via-Text Via-Hole Fill-Text Fill-Hole Poly-Text Poly-Hole Region-Text Region-Hole Text-Text Text-Hole)
Clearance "Schematic Clearance Constraint_56" [InNet('CB_3_S1')] p109: gap=0.5 ignorepadtopadclearanceinfootprint=TRUE except(0.15: Arc-Text Arc-Hole Track-Text Track-Hole SMDPad-Text SMDPad-Hole THPad-Text THPad-Hole Via-Text Via-Hole Fill-Text Fill-Hole Poly-Text Poly-Hole Region-Text Region-Hole Text-Text Text-Hole)
Clearance "Schematic Clearance Constraint_55" [InNet('CB_4:3_C_S1')] p110: gap=0.5 ignorepadtopadclearanceinfootprint=TRUE except(0.15: Arc-Text Arc-Hole Track-Text Track-Hole SMDPad-Text SMDPad-Hole THPad-Text THPad-Hole Via-Text Via-Hole Fill-Text Fill-Hole Poly-Text Poly-Hole Region-Text Region-Hole Text-Text Text-Hole)
Clearance "Schematic Clearance Constraint_54" [InNet('CB_4_S1')] p111: gap=0.5 ignorepadtopadclearanceinfootprint=TRUE except(0.15: Arc-Text Arc-Hole Track-Text Track-Hole SMDPad-Text SMDPad-Hole THPad-Text THPad-Hole Via-Text Via-Hole Fill-Text Fill-Hole Poly-Text Poly-Hole Region-Text Region-Hole Text-Text Text-Hole)
Clearance "Schematic Clearance Constraint_53" [InNet('CB_5_S1')] p112: gap=0.5 ignorepadtopadclearanceinfootprint=TRUE except(0.15: Arc-Text Arc-Hole Track-Text Track-Hole SMDPad-Text SMDPad-Hole THPad-Text THPad-Hole Via-Text Via-Hole Fill-Text Fill-Hole Poly-Text Poly-Hole Region-Text Region-Hole Text-Text Text-Hole)
Clearance "Schematic Clearance Constraint_52" [InNet('CB_6:5_C_S1')] p113: gap=0.5 ignorepadtopadclearanceinfootprint=TRUE except(0.15: Arc-Text Arc-Hole Track-Text Track-Hole SMDPad-Text SMDPad-Hole THPad-Text THPad-Hole Via-Text Via-Hole Fill-Text Fill-Hole Poly-Text Poly-Hole Region-Text Region-Hole Text-Text Text-Hole)
Clearance "Schematic Clearance Constraint_51" [InNet('CB_6_S1')] p114: gap=0.5 ignorepadtopadclearanceinfootprint=TRUE except(0.15: Arc-Text Arc-Hole Track-Text Track-Hole SMDPad-Text SMDPad-Hole THPad-Text THPad-Hole Via-Text Via-Hole Fill-Text Fill-Hole Poly-Text Poly-Hole Region-Text Region-Hole Text-Text Text-Hole)
Clearance "Schematic Clearance Constraint_50" [InNet('CB_8:7_C_S1')] p115: gap=0.5 ignorepadtopadclearanceinfootprint=TRUE except(0.15: Arc-Text Arc-Hole Track-Text Track-Hole SMDPad-Text SMDPad-Hole THPad-Text THPad-Hole Via-Text Via-Hole Fill-Text Fill-Hole Poly-Text Poly-Hole Region-Text Region-Hole Text-Text Text-Hole)
Clearance "Schematic Clearance Constraint_49" [InNet('CB_13_S1')] p116: gap=0.5 ignorepadtopadclearanceinfootprint=TRUE except(0.15: Arc-Text Arc-Hole Track-Text Track-Hole SMDPad-Text SMDPad-Hole THPad-Text THPad-Hole Via-Text Via-Hole Fill-Text Fill-Hole Poly-Text Poly-Hole Region-Text Region-Hole Text-Text Text-Hole)
Clearance "Schematic Clearance Constraint_48" [InNet('CB_8_S1')] p117: gap=0.5 ignorepadtopadclearanceinfootprint=TRUE except(0.15: Arc-Text Arc-Hole Track-Text Track-Hole SMDPad-Text SMDPad-Hole THPad-Text THPad-Hole Via-Text Via-Hole Fill-Text Fill-Hole Poly-Text Poly-Hole Region-Text Region-Hole Text-Text Text-Hole)
Clearance "Schematic Clearance Constraint_47" [InNet('CB_9_S1')] p118: gap=0.5 ignorepadtopadclearanceinfootprint=TRUE except(0.15: Arc-Text Arc-Hole Track-Text Track-Hole SMDPad-Text SMDPad-Hole THPad-Text THPad-Hole Via-Text Via-Hole Fill-Text Fill-Hole Poly-Text Poly-Hole Region-Text Region-Hole Text-Text Text-Hole)
Clearance "Schematic Clearance Constraint_46" [InNet('CB_10:9_C_S1')] p119: gap=0.5 ignorepadtopadclearanceinfootprint=TRUE except(0.15: Arc-Text Arc-Hole Track-Text Track-Hole SMDPad-Text SMDPad-Hole THPad-Text THPad-Hole Via-Text Via-Hole Fill-Text Fill-Hole Poly-Text Poly-Hole Region-Text Region-Hole Text-Text Text-Hole)
Clearance "Schematic Clearance Constraint_45" [InNet('CB_10_S1')] p120: gap=0.5 ignorepadtopadclearanceinfootprint=TRUE except(0.15: Arc-Text Arc-Hole Track-Text Track-Hole SMDPad-Text SMDPad-Hole THPad-Text THPad-Hole Via-Text Via-Hole Fill-Text Fill-Hole Poly-Text Poly-Hole Region-Text Region-Hole Text-Text Text-Hole)
Clearance "Schematic Clearance Constraint_44" [InNet('CB_11_S1')] p121: gap=0.5 ignorepadtopadclearanceinfootprint=TRUE except(0.15: Arc-Text Arc-Hole Track-Text Track-Hole SMDPad-Text SMDPad-Hole THPad-Text THPad-Hole Via-Text Via-Hole Fill-Text Fill-Hole Poly-Text Poly-Hole Region-Text Region-Hole Text-Text Text-Hole)
Clearance "Schematic Clearance Constraint_43" [InNet('CB_12:11_C_S1')] p122: gap=0.5 ignorepadtopadclearanceinfootprint=TRUE except(0.15: Arc-Text Arc-Hole Track-Text Track-Hole SMDPad-Text SMDPad-Hole THPad-Text THPad-Hole Via-Text Via-Hole Fill-Text Fill-Hole Poly-Text Poly-Hole Region-Text Region-Hole Text-Text Text-Hole)
Clearance "Schematic Clearance Constraint_42" [InNet('CB_12_S1')] p123: gap=0.5 ignorepadtopadclearanceinfootprint=TRUE except(0.15: Arc-Text Arc-Hole Track-Text Track-Hole SMDPad-Text SMDPad-Hole THPad-Text THPad-Hole Via-Text Via-Hole Fill-Text Fill-Hole Poly-Text Poly-Hole Region-Text Region-Hole Text-Text Text-Hole)
Clearance "Schematic Clearance Constraint_41" [InNet('NetC27_S1_2')] p124: gap=0.5 ignorepadtopadclearanceinfootprint=TRUE except(0.15: Arc-Text Arc-Hole Track-Text Track-Hole SMDPad-Text SMDPad-Hole THPad-Text THPad-Hole Via-Text Via-Hole Fill-Text Fill-Hole Poly-Text Poly-Hole Region-Text Region-Hole Text-Text Text-Hole)
Clearance "Schematic Clearance Constraint_40" [InNet('NetC31_S1_2')] p125: gap=0.5 ignorepadtopadclearanceinfootprint=TRUE except(0.15: Arc-Text Arc-Hole Track-Text Track-Hole SMDPad-Text SMDPad-Hole THPad-Text THPad-Hole Via-Text Via-Hole Fill-Text Fill-Hole Poly-Text Poly-Hole Region-Text Region-Hole Text-Text Text-Hole)
Clearance "Schematic Clearance Constraint_39" [InNet('NetC37_S1_2')] p126: gap=0.5 ignorepadtopadclearanceinfootprint=TRUE except(0.15: Arc-Text Arc-Hole Track-Text Track-Hole SMDPad-Text SMDPad-Hole THPad-Text THPad-Hole Via-Text Via-Hole Fill-Text Fill-Hole Poly-Text Poly-Hole Region-Text Region-Hole Text-Text Text-Hole)
Clearance "Schematic Clearance Constraint_38" [InNet('NetR59_RB_C71_2')] p127: gap=0.5 ignorepadtopadclearanceinfootprint=TRUE except(0.15: Arc-Text Arc-Hole Track-Text Track-Hole SMDPad-Text SMDPad-Hole THPad-Text THPad-Hole Via-Text Via-Hole Fill-Text Fill-Hole Poly-Text Poly-Hole Region-Text Region-Hole Text-Text Text-Hole)
Clearance "Schematic Clearance Constraint_37" [InNet('NetR57_RB_NA21_2')] p128: gap=0.5 ignorepadtopadclearanceinfootprint=TRUE except(0.15: Arc-Text Arc-Hole Track-Text Track-Hole SMDPad-Text SMDPad-Hole THPad-Text THPad-Hole Via-Text Via-Hole Fill-Text Fill-Hole Poly-Text Poly-Hole Region-Text Region-Hole Text-Text Text-Hole)
Clearance "Schematic Clearance Constraint_36" [InNet('NetR59_RB_C11_2')] p129: gap=0.5 ignorepadtopadclearanceinfootprint=TRUE except(0.15: Arc-Text Arc-Hole Track-Text Track-Hole SMDPad-Text SMDPad-Hole THPad-Text THPad-Hole Via-Text Via-Hole Fill-Text Fill-Hole Poly-Text Poly-Hole Region-Text Region-Hole Text-Text Text-Hole)
Clearance "Schematic Clearance Constraint_35" [InNet('NetR59_RB_C21_2')] p130: gap=0.5 ignorepadtopadclearanceinfootprint=TRUE except(0.15: Arc-Text Arc-Hole Track-Text Track-Hole SMDPad-Text SMDPad-Hole THPad-Text THPad-Hole Via-Text Via-Hole Fill-Text Fill-Hole Poly-Text Poly-Hole Region-Text Region-Hole Text-Text Text-Hole)
Clearance "Schematic Clearance Constraint_34" [InNet('NetR59_RB_C31_2')] p131: gap=0.5 ignorepadtopadclearanceinfootprint=TRUE except(0.15: Arc-Text Arc-Hole Track-Text Track-Hole SMDPad-Text SMDPad-Hole THPad-Text THPad-Hole Via-Text Via-Hole Fill-Text Fill-Hole Poly-Text Poly-Hole Region-Text Region-Hole Text-Text Text-Hole)
Clearance "Schematic Clearance Constraint_33" [InNet('NetR59_RB_C41_2')] p132: gap=0.5 ignorepadtopadclearanceinfootprint=TRUE except(0.15: Arc-Text Arc-Hole Track-Text Track-Hole SMDPad-Text SMDPad-Hole THPad-Text THPad-Hole Via-Text Via-Hole Fill-Text Fill-Hole Poly-Text Poly-Hole Region-Text Region-Hole Text-Text Text-Hole)
Clearance "Schematic Clearance Constraint_32" [InNet('NetR59_RB_C51_2')] p133: gap=0.5 ignorepadtopadclearanceinfootprint=TRUE except(0.15: Arc-Text Arc-Hole Track-Text Track-Hole SMDPad-Text SMDPad-Hole THPad-Text THPad-Hole Via-Text Via-Hole Fill-Text Fill-Hole Poly-Text Poly-Hole Region-Text Region-Hole Text-Text Text-Hole)
Clearance "Schematic Clearance Constraint_31" [InNet('NetR59_RB_C61_2')] p134: gap=0.5 ignorepadtopadclearanceinfootprint=TRUE except(0.15: Arc-Text Arc-Hole Track-Text Track-Hole SMDPad-Text SMDPad-Hole THPad-Text THPad-Hole Via-Text Via-Hole Fill-Text Fill-Hole Poly-Text Poly-Hole Region-Text Region-Hole Text-Text Text-Hole)
Clearance "Schematic Clearance Constraint_30" [InNet('NetR59_RB_C81_2')] p135: gap=0.5 ignorepadtopadclearanceinfootprint=TRUE except(0.15: Arc-Text Arc-Hole Track-Text Track-Hole SMDPad-Text SMDPad-Hole THPad-Text THPad-Hole Via-Text Via-Hole Fill-Text Fill-Hole Poly-Text Poly-Hole Region-Text Region-Hole Text-Text Text-Hole)
Clearance "Schematic Clearance Constraint_29" [InNet('NetR57_RB_C1111_2')] p136: gap=0.5 ignorepadtopadclearanceinfootprint=TRUE except(0.15: Arc-Text Arc-Hole Track-Text Track-Hole SMDPad-Text SMDPad-Hole THPad-Text THPad-Hole Via-Text Via-Hole Fill-Text Fill-Hole Poly-Text Poly-Hole Region-Text Region-Hole Text-Text Text-Hole)
Clearance "Schematic Clearance Constraint_28" [InNet('NetR59_RB_C91_2')] p137: gap=0.5 ignorepadtopadclearanceinfootprint=TRUE except(0.15: Arc-Text Arc-Hole Track-Text Track-Hole SMDPad-Text SMDPad-Hole THPad-Text THPad-Hole Via-Text Via-Hole Fill-Text Fill-Hole Poly-Text Poly-Hole Region-Text Region-Hole Text-Text Text-Hole)
Clearance "Schematic Clearance Constraint_27" [InNet('NetR59_RB_C101_2')] p138: gap=0.5 ignorepadtopadclearanceinfootprint=TRUE except(0.15: Arc-Text Arc-Hole Track-Text Track-Hole SMDPad-Text SMDPad-Hole THPad-Text THPad-Hole Via-Text Via-Hole Fill-Text Fill-Hole Poly-Text Poly-Hole Region-Text Region-Hole Text-Text Text-Hole)
Clearance "Schematic Clearance Constraint_26" [InNet('NetR59_RB_C121_2')] p139: gap=0.5 ignorepadtopadclearanceinfootprint=TRUE except(0.15: Arc-Text Arc-Hole Track-Text Track-Hole SMDPad-Text SMDPad-Hole THPad-Text THPad-Hole Via-Text Via-Hole Fill-Text Fill-Hole Poly-Text Poly-Hole Region-Text Region-Hole Text-Text Text-Hole)
Clearance "Schematic Clearance Constraint_25" [InNet('NetR59_RB_C1111_2')] p140: gap=0.5 ignorepadtopadclearanceinfootprint=TRUE except(0.15: Arc-Text Arc-Hole Track-Text Track-Hole SMDPad-Text SMDPad-Hole THPad-Text THPad-Hole Via-Text Via-Hole Fill-Text Fill-Hole Poly-Text Poly-Hole Region-Text Region-Hole Text-Text Text-Hole)
Clearance "Schematic Clearance Constraint_24" [InNet('NetR59_RB_NA11_2')] p141: gap=0.5 ignorepadtopadclearanceinfootprint=TRUE except(0.15: Arc-Text Arc-Hole Track-Text Track-Hole SMDPad-Text SMDPad-Hole THPad-Text THPad-Hole Via-Text Via-Hole Fill-Text Fill-Hole Poly-Text Poly-Hole Region-Text Region-Hole Text-Text Text-Hole)
Clearance "Schematic Clearance Constraint_23" [InNet('NetR59_RB_NA21_2')] p142: gap=0.5 ignorepadtopadclearanceinfootprint=TRUE except(0.15: Arc-Text Arc-Hole Track-Text Track-Hole SMDPad-Text SMDPad-Hole THPad-Text THPad-Hole Via-Text Via-Hole Fill-Text Fill-Hole Poly-Text Poly-Hole Region-Text Region-Hole Text-Text Text-Hole)
Clearance "Schematic Clearance Constraint_22" [InNet('S1_VBAT')] p143: gap=0.5 ignorepadtopadclearanceinfootprint=TRUE except(0.15: Arc-Text Arc-Hole Track-Text Track-Hole SMDPad-Text SMDPad-Hole THPad-Text THPad-Hole Via-Text Via-Hole Fill-Text Fill-Hole Poly-Text Poly-Hole Region-Text Region-Hole Text-Text Text-Hole)
Clearance "Schematic Clearance Constraint_21" [InNet('NetR57_RB_NA11_2')] p144: gap=0.5 ignorepadtopadclearanceinfootprint=TRUE except(0.15: Arc-Text Arc-Hole Track-Text Track-Hole SMDPad-Text SMDPad-Hole THPad-Text THPad-Hole Via-Text Via-Hole Fill-Text Fill-Hole Poly-Text Poly-Hole Region-Text Region-Hole Text-Text Text-Hole)
Clearance "Schematic Clearance Constraint_20" [InNet('NetR57_RB_C121_2')] p145: gap=0.5 ignorepadtopadclearanceinfootprint=TRUE except(0.15: Arc-Text Arc-Hole Track-Text Track-Hole SMDPad-Text SMDPad-Hole THPad-Text THPad-Hole Via-Text Via-Hole Fill-Text Fill-Hole Poly-Text Poly-Hole Region-Text Region-Hole Text-Text Text-Hole)
Clearance "Schematic Clearance Constraint_19" [InNet('NetC40_S1_2')] p146: gap=0.5 ignorepadtopadclearanceinfootprint=TRUE except(0.15: Arc-Text Arc-Hole Track-Text Track-Hole SMDPad-Text SMDPad-Hole THPad-Text THPad-Hole Via-Text Via-Hole Fill-Text Fill-Hole Poly-Text Poly-Hole Region-Text Region-Hole Text-Text Text-Hole)
Clearance "Schematic Clearance Constraint_18" [InNet('NetR57_RB_C11_2')] p147: gap=0.5 ignorepadtopadclearanceinfootprint=TRUE except(0.15: Arc-Text Arc-Hole Track-Text Track-Hole SMDPad-Text SMDPad-Hole THPad-Text THPad-Hole Via-Text Via-Hole Fill-Text Fill-Hole Poly-Text Poly-Hole Region-Text Region-Hole Text-Text Text-Hole)
Clearance "Schematic Clearance Constraint_17" [InNet('NetC43_S1_2')] p148: gap=0.5 ignorepadtopadclearanceinfootprint=TRUE except(0.15: Arc-Text Arc-Hole Track-Text Track-Hole SMDPad-Text SMDPad-Hole THPad-Text THPad-Hole Via-Text Via-Hole Fill-Text Fill-Hole Poly-Text Poly-Hole Region-Text Region-Hole Text-Text Text-Hole)